# EAGLE board sonoff_relay (EAGLE 7.5.0)
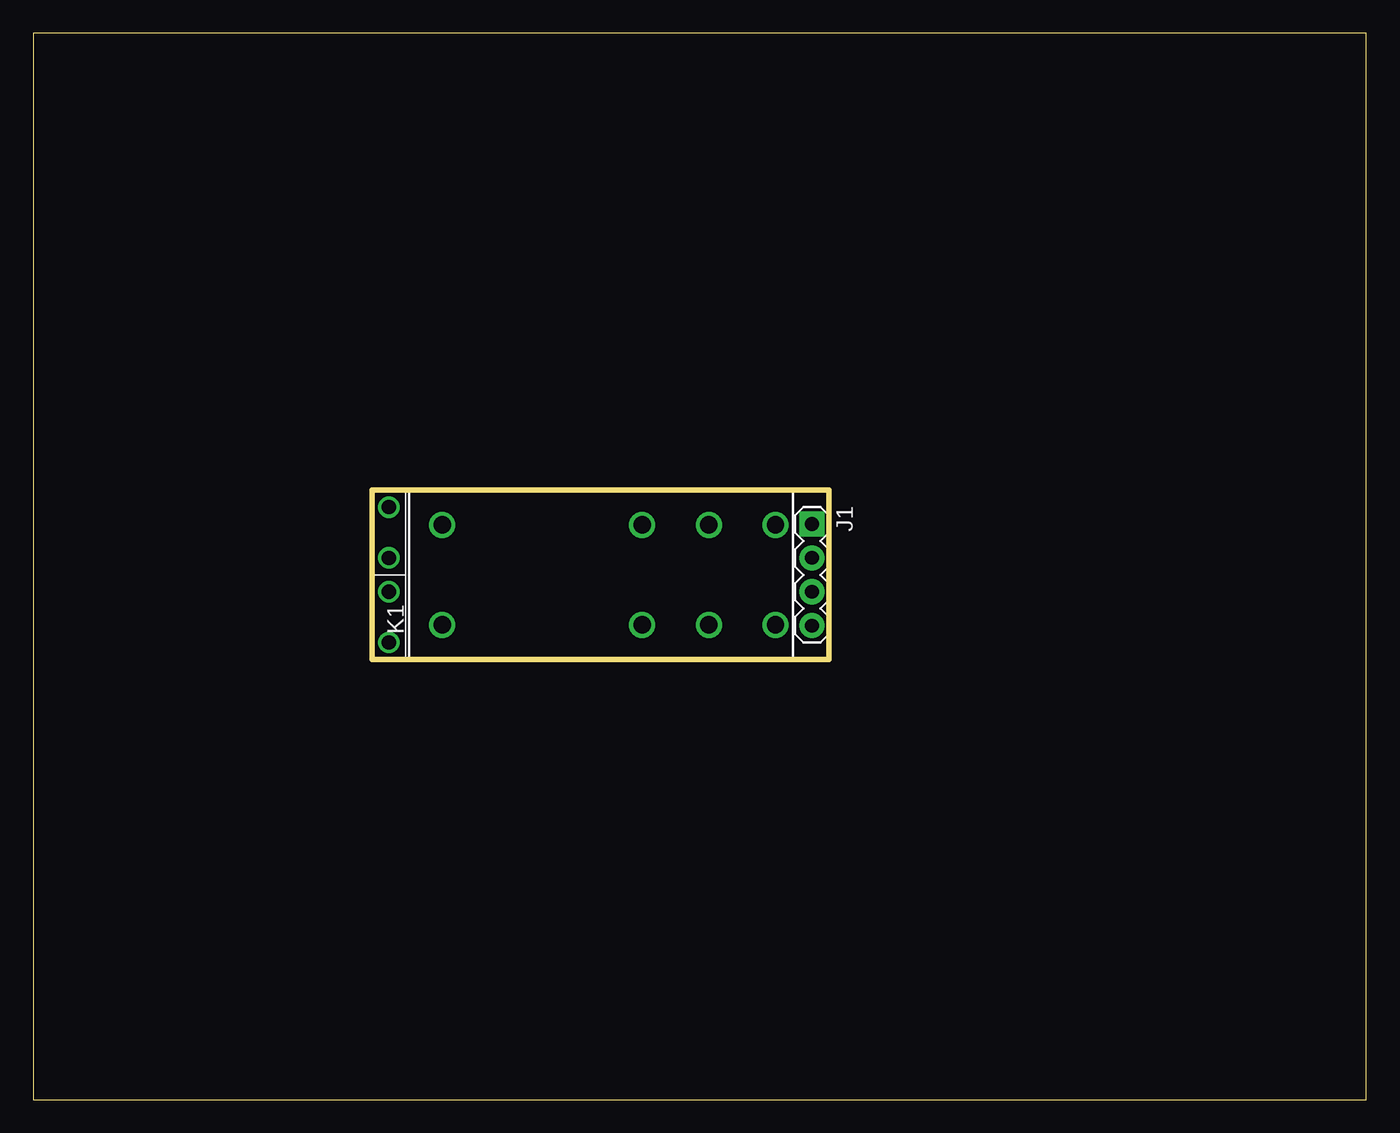
[diagram p0: board, top side]
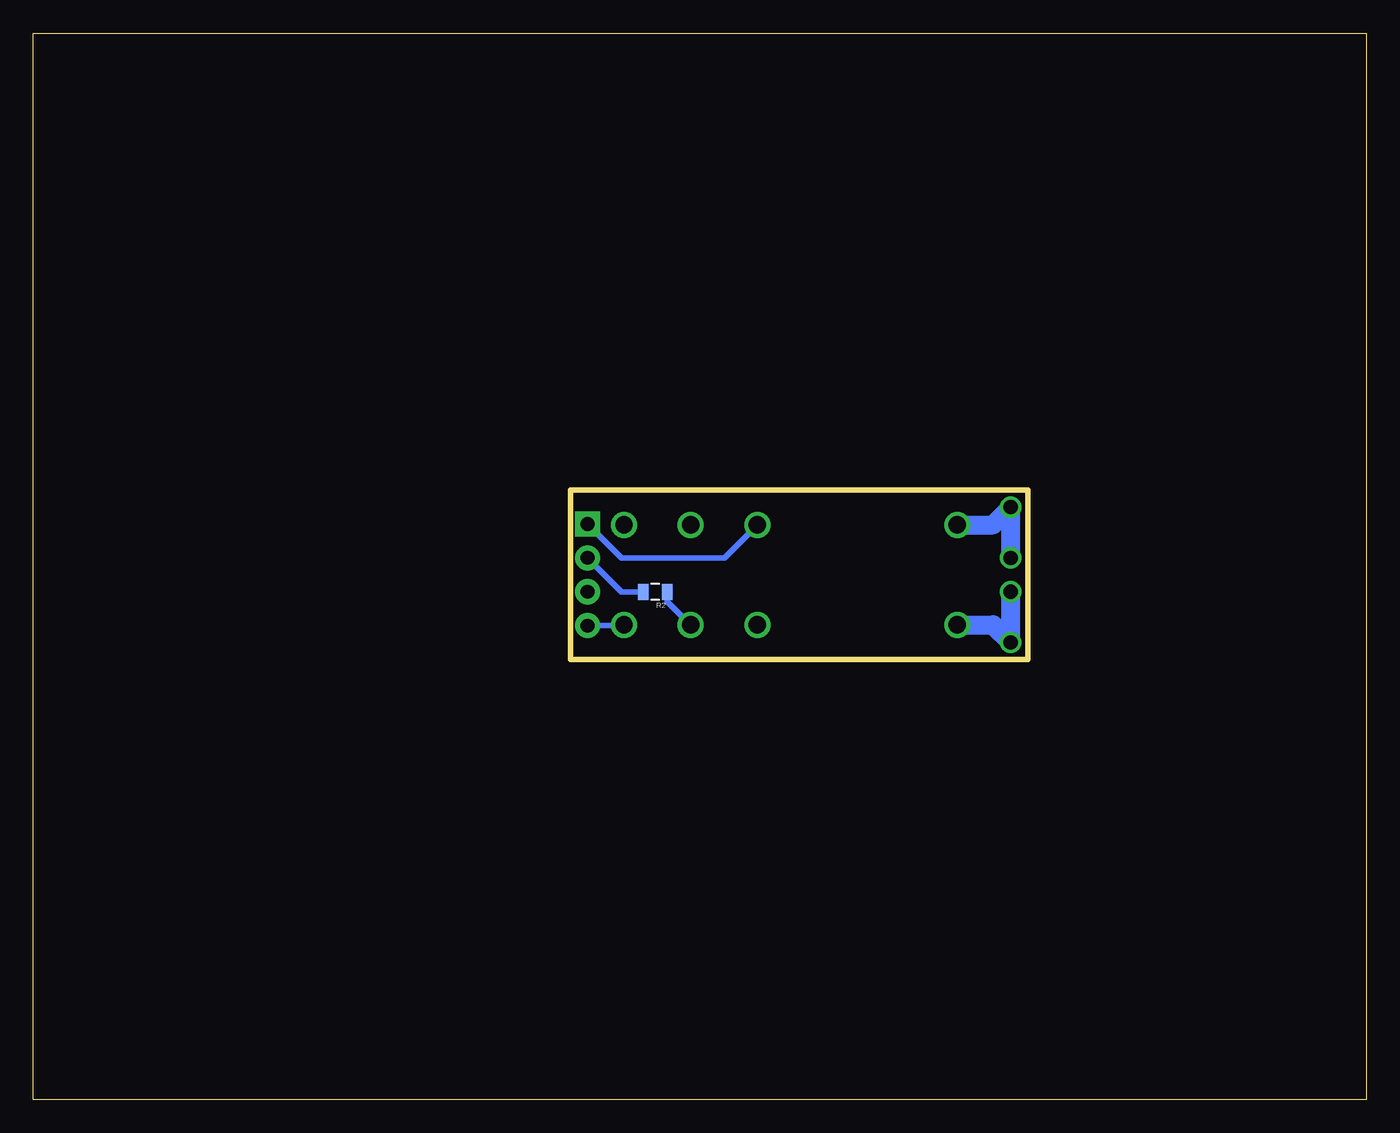
[diagram p1: board, bottom side, seen from below]

Size 100 x 80 mm. Coordinates in mm from the lower left corner, seen from the top.
Outline: 0,0 100,0 100,80 0,80 0,0
Outline: 25.4,45.72 59.69,45.72 59.69,33.02 25.4,33.02 25.4,45.72
Copper layers (1*16): Top 0.035mm / dielectric 1.5mm / Bottom 0.035mm
Design rules "default": minimum track width 10mil, minimum drill 24mil, track to track 8mil, track to pad 8mil, pad to pad 8mil, via to via 8mil, smd to smd 8mil, copper to edge 40mil, drill to drill 8mil, minimum pad ring 10mil, minimum via ring 8mil, stop-mask expansion 4mil, vias tented up to drill 0mil, thermal gap 10mil

## Footprints (pad centres in the part's own frame; a part is rotated, then mirrored left to right if it is on the bottom)
1X04 = drill 1.016 pad 1.88 square: 1 0,0 | drill 1.016 pad 1.88: 2 2.54,0; 3 5.08,0; 4 7.62,0
1X02_BIG = drill 1.067: P$1 0,0; P$2 3.81,0
FTR-K1C = drill 1.3 pad 1.93: 1 -12.5,-3.75; 2 2.5,-3.75; 3 7.5,-3.75; 4 12.5,-3.75; 5 12.5,3.75; 6 7.5,3.75; 7 2.5,3.75; 8 -12.5,3.75
0805 = smd 0.8 x 1.2: 1 -0.9,0; 2 0.9,0

## Placement (x,y rotation side)
J1  [1X04]  58.42,43.18 270 top
J2  [1X02_BIG]  26.67,34.29 90 top
J4  [1X02_BIG]  26.67,44.45 270 top
K1  FTR-K1C  [FTR-K1C]  43.18,39.37 0 top
R2  10k  [0805]  53.34,38.1 180 bottom

## Library data of the parts
J1 = SparkFun-Connectors; PROD_ID: CONN-09696
J2 J4 = SparkFun-Connectors
K1 = relay; OC_FARNELL: unknown; OC_NEWARK: unknown
R2 = SparkFun-Passives

## Nets
GND: J1.1 K1.7
L: J2.P$1 J2.P$2 K1.1
N: J4.P$1 J4.P$2 K1.8
N$2: K1.3 R2.1
RX: J1.3
TX: J1.2 R2.2
VCC: J1.4 K1.4

## Tracks (layer width: path | path; a pad name or v marks a point on that pad's centre or on a via)
GND
  Bottom 0.406: J1.1 55.88,40.64 48.16,40.64 K1.7
L
  Bottom 1.422: K1.1 28,35.62 J2.P$1 J2.P$2
N
  Bottom 1.422: K1.8 28,43.12 J4.P$1 J4.P$2
N$2
  Bottom 0.406: R2.1 52.44,37.38 K1.3
TX
  Bottom 0.406: J1.2 55.88,38.1 R2.2
VCC
  Bottom 0.406: J1.4 55.74,35.56 K1.4